# Altium PCB Window Comparator.PcbDoc
Units mm, origin at the board's own origin, x right, y up, seen from the top; angles counter-clockwise.
Board outline 20.7 x 16.51 mm, 2 copper layers (Top Layer, Bottom Layer); 10 components, 10 nets, 31 pads, 5 vias.
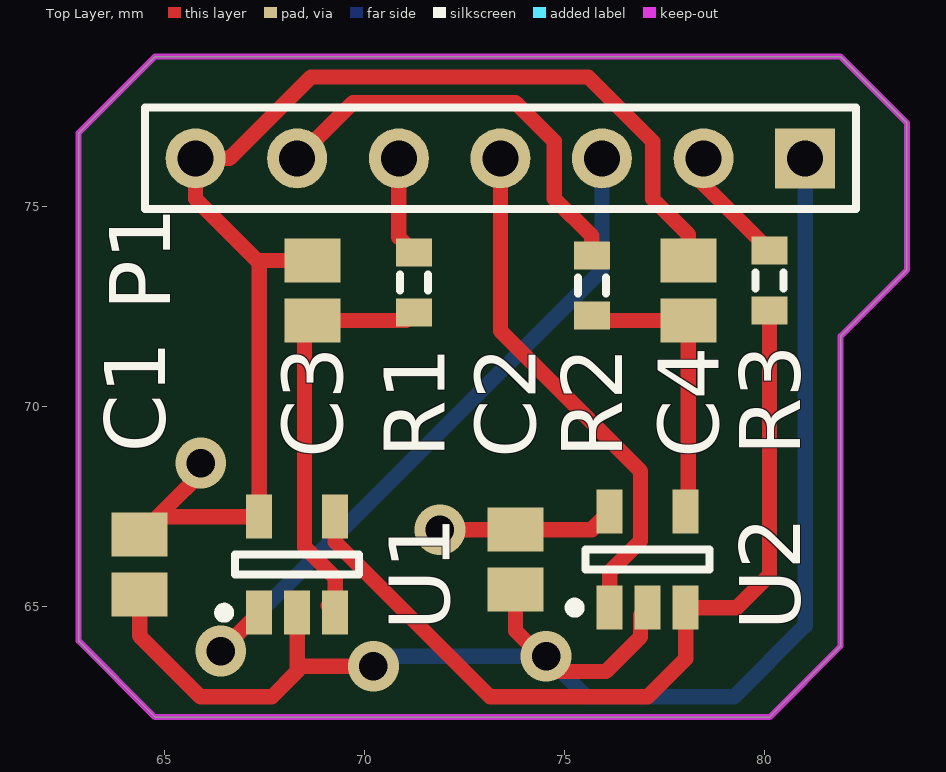
[diagram p0: Top Layer view]
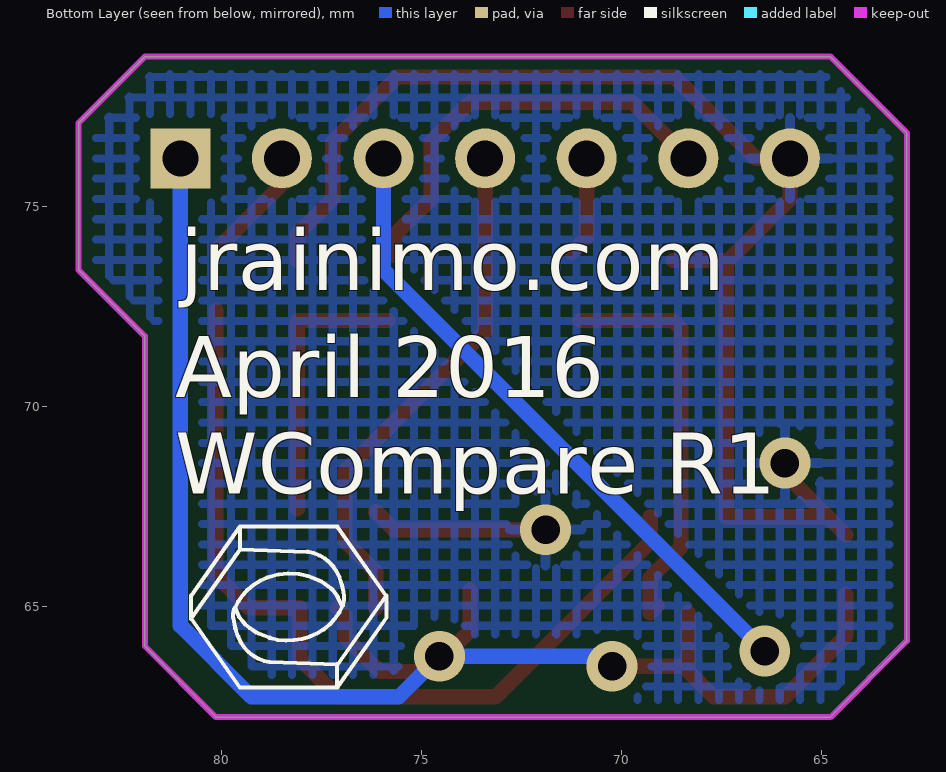
[diagram p1: Bottom Layer view, seen from below]

## Layer stack, top to bottom
Top Layer: signal copper 0.0356
Dielectric: dielectric 0.32, FR-4, Dk 4.8
Bottom Layer: signal copper 0.0356

## Board outline
62.865,64.135 64.77,62.23 80.137,62.23 81.915,64.008 81.915,71.755 83.566,73.406 83.566,77.089 81.915,78.74 64.77,78.74 62.865,76.835

## Design rules (kind name [scope] priority, off if disabled: settings)
Clearance [All] p1: gap=0.16
PolygonConnect [All] p1: connectstyle=Relief reliefconductorwidth=0.254 reliefentries=4 polygonreliefangle="90 Angle"
RoutingVias [All] p1: holewidth=0.711 width=1.27 viastyle="Through Hole" minholewidth=0.711 minwidth=1.27 maxholewidth=0.711 maxwidth=1.27
SilkscreenOverComponentPads [All] p1: minsilkscreentomaskgap=0.254
SolderMaskExpansion [All] p1: expansion=0.102
Width [All] p1: maxlimit=0.381 minlimit=0.16 preferedwidth=0.254 minimp=50.000000 maximp=50.000000 favimp=50.000000
27 further rules are at their usual default settings.

## Classes and differential pairs
component class "2 - Window Comparator": C1 C2 C3 P1 R1 R2 R3 U1 U2

## Components (designator, comment, footprint, x,y, rotation, side; value= is the part's Value field where it differs from the comment)
C1 "Cap Pol3" C0805 64.389,66.04 r90 top
C2 "Cap Pol3" C0805 73.787,66.167 r90 top
C3 "Cap Pol3" C0805 68.707,72.898 r90 top
C4 "Cap Pol3" C0805 78.105,72.898 r90 top
P1 "Header 7" HDR1X7 81.026,76.2 r180 top
R1 "Res3" J1-0603 71.247,73.098 r90 top
R2 "Res3" J1-0603 75.692,73.025 r90 top
R3 "Res3" J1-0603 80.137,73.152 r270 top
U1 "MCP6001T-I/OT" SOT-23-OT5_N 68.326,66.04 r90 top
U2 "MCP6001T-I/OT" SOT-23-OT5_N 77.089,66.167 r90 top

## Footprints (in the part's own frame and the unit in brackets; to place one, negate y for a bottom-side part, rotate by r counter-clockwise, add the part's x,y. Pads: shape width x height; smd on the part's side, far side on the other; paste and mask are expansions set on the pad)
C0805 [mm] "Chip Capacitor, Body 2.0x1.3mm, IPC High Density"
  rect 1.1x1.4 smd: 1(-0.75,0) 2(0.75,0)
  body extent -1.1,-0.72 1.1,0.72, height 1.4
HDR1X7 [mm] "Connector; Header; 7 Position"
  rect 1.5x1.5 hole 0.9: 1(0,0)
  round 1.5 hole 0.9: 2(2.54,0) 3(5.08,0) 4(7.62,0) 5(10.16,0) 6(12.7,0) 7(15.24,0)
  silkscreen extent -1.27,-1.27 16.51,1.27
J1-0603 [mm] "Chip Resistor, Body 1.6x0.8mm, IPC High Density"
  rect 0.7x0.9 smd: 1(-0.75,0) 2(0.75,0)
  silkscreen extent -0.2,-0.35 0.2,0.35, body extent -0.85,-0.48 0.85,0.48, height 0.9
SOT-23-OT5_N [mm] "SOT23, 5-Leads, Body 2.9x1.6mm, Pitch 0.95mm, Lead Span 2.7mm, IPC Medium Density"
  rect 1.1x0.65 smd: 1(-1.2,0.95) 2(-1.2,0) 3(-1.2,-0.95) 4(1.2,-0.95) 5(1.2,0.95)
  silkscreen extent -1.32,-1.55 0.25,1.95, body extent -0.9,-1.55 0.9,1.55, height 1.45

## Part data
C1 C2 C3 C4: "Polarized Capacitor (Surface Mount)"
P1: "Header, 7-Pin"
R1 R2 R3: "Resistor"
U1 U2: "1 MHz, Low-Power Operational Amplifier, 5-Pin SOT-23, Industrial Temperature, Tape and Reel"

## Via types
v1: diameter 1.27, hole 0.711, Top Layer to Bottom Layer, 5 vias

## Nets (pads, with @x,y where several pads share a name; then routed paths per layer and width w, separated by ;. In a path a pad name is that pad's centre, name@x,y a point inside that pad or via, vN(x,y) a via of type N, cw(c..) or ccw(c..) an arc to the next point about the centre after c; other vN are vias at no path point)
GND: C1.2 C2.2 C3.2 C4.2 P1.7 U1.5 U2.5 | length 37
  Top Layer w0.381: C1.2 C1.2@64.839,67.24 ; v1(65.913,68.58) 66.179,68.58 C1.2@64.839,67.24 ; 67.376,73.594 U1.5 C1.2@64.839,67.24 ; C3.2 67.322,73.648 65.786,75.184 P1.7 66.637,76.2 68.669,78.232 75.603,78.232 77.216,76.619 77.216,75.184 78.105,74.295 C4.2 ; v1(71.894,66.917) C2.2 75.689,66.917 U2.5
HIGH: P1.5 R1.2 | length 2.5
  Top Layer w0.381: P1.5 70.866,74.229 R1.2
HIGH_O: P1.3 U1.1 | length 17.6
  Top Layer w0.381: v1(66.417,63.881) U1.1
  Bottom Layer w0.381: v1(66.417,63.881) 75.946,73.41 P1.3
IN: P1.2 R3.1 | length 3
  Top Layer w0.381: P1.2 78.486,75.553 R3.1
LOW: P1.6 R2.2 | length 10.7
  Top Layer w0.381: P1.6 69.723,77.597 73.787,77.597 74.751,76.633 74.751,75.197 75.692,74.257 R2.2
LOW_O: P1.4 U2.1 | length 13
  Top Layer w0.381: P1.4 73.406,71.882 76.908,68.38 76.908,66.633 76.139,65.863 U2.1
NetC3_1: C3.1 R1.1 U1.3 | length 10.3
  Top Layer w0.381: U1.3@69.096,65.02 U1.3 69.276,65.716 68.506,66.485 68.506,71.948 C3.1 R1.1@71.047,72.148
NetC4_1: C4.1 R2.1 U2.4 | length 7
  Top Layer w0.381: R2.1@75.819,72.148 C4.1 U2.4@78.105,67.433
NetR3_2: R3.2 U1.4 U2.3 | length 21.7
  Top Layer w0.381: U1.4 69.276,66.614 73.152,62.738 77.089,62.738 78.039,63.688 U2.3 79.318,64.967 80.137,65.786 R3.2
VCC: C1.1 C2.1 P1.1 U1.2 U2.2 | length 38.7
  Top Layer w0.381: C1.1 64.389,64.262 65.913,62.738 67.691,62.738 68.326,63.373 U1.2 ; 68.453,63.5 69.723,63.5 v1(70.231,63.5) ; C2.1 73.787,64.389 v1@74.549,63.627 ; v1(74.549,63.754) v1@74.549,63.627 ; U2.2 76.908,64.786 76.908,64.233 76.049,63.373 74.803,63.373 v1@74.549,63.627
  Bottom Layer w0.381: v1(70.231,63.5) 70.485,63.754 v1(74.549,63.754) 75.565,62.738 79.248,62.738 81.026,64.516 P1.1

## Polygon pours and split planes (outlines as drawn)
GND on Bottom Layer "Bottom Layer-No Net" (hatched 90Degree grid 0.508 track 0.203, remove dead copper, pour order 2): 62.865,64.135 64.77,62.23 80.137,62.23 81.915,64.008 81.915,71.755 83.566,73.406 83.566,77.089 81.915,78.74 64.77,78.74 62.865,76.835

## Keep-outs
Keep-Out Layer:
  the board outline again, w0.15

## Silkscreen, mask and mechanical layers (free items; w line width, h text height)
Bottom Overlay:
  lines w0.1: 75.885,65.264 77.106,66.994 ; 76.943,65.361 76.981,65.527 77.053,65.73 cw(c78,65.363) 77.845,66.367 ; 76.948,65.101 76.939,65.168 76.941,65.28 76.963,65.426 ; 76.957,65.039 76.967,65.013 ; 76.961,65.023 ccw(c78.27,65.583) 77.782,64.245 ccw(c78.345,65.789) 78.792,64.208 ; 76.982,65 77.121,65.284 ; 77.078,65.231 77.231,65.426 77.498,65.623 77.844,65.763 ; 77.089,62.992 75.873,64.716 75.873,65.276 77.097,63.545 ; 77.099,62.969 79.535,62.969 80.76,64.707 ; 77.099,63.553 77.106,63.553 77.106,62.977 ; 77.102,63.55 77.104,63.55 ; 77.102,67.001 79.538,67.001 ; 77.106,63.549 78.791,63.611 ; 77.846,66.36 79.531,66.421 80.751,64.707 ; 78.792,63.604 ccw(c78.637,64.608) 79.584,64.241 ; 78.852,65.719 cw(c78.366,64.387) 79.669,64.945 ; 78.854,65.725 78.566,65.802 78.337,65.824 78.054,65.808 77.844,65.763 ; 79.139,64.348 79.405,64.545 79.558,64.74 79.662,64.969 ; 79.297,64.459 79.068,64.32 78.79,64.215 ; 79.52,66.436 79.523,66.436 ; 79.531,66.994 79.531,66.417 79.538,66.417 ; 79.538,66.987 80.754,65.263 ; 79.637,64.405 79.674,64.545 79.696,64.69 ; 79.656,64.444 79.584,64.241 ; 79.68,64.931 79.693,64.887 79.704,64.804 79.705,64.717 ; 80.761,64.68 80.761,65.265 ; 77.844,65.763 77.846,65.756 77.844,65.763 ; 78.79,64.215 78.792,64.208 ; 78.79,64.215 78.792,64.208 ; 78.79,64.215 78.792,64.208 ; 78.79,64.215 78.792,64.208 ; 79.577,64.244 79.584,64.241 ; 79.577,64.244 79.584,64.241 ; 79.577,64.244 79.584,64.241 ; 79.577,64.244 79.584,64.241
  text "jrainimo.com" at 81.026,72.898 h1.52
  text "April 2016" at 81.153,70.231 h1.52
  text "WCompare R1" at 81.153,67.818 h1.52